# Altium PCB 06002480宁波2号线二期车载PIS系统_功率放大器音频板2 BHC-A-2030-05_PCB V1.0.PcbDoc (part 3 of 6)
Units mil, origin at the board's own origin, x right, y up, seen from the top; angles counter-clockwise.
Board outline 3385.83 x 3779.53 mil, 4 copper layers (Top Layer, GND, VDD, Bottom Layer); 210 components, 185 nets, 792 pads, 313 vias.
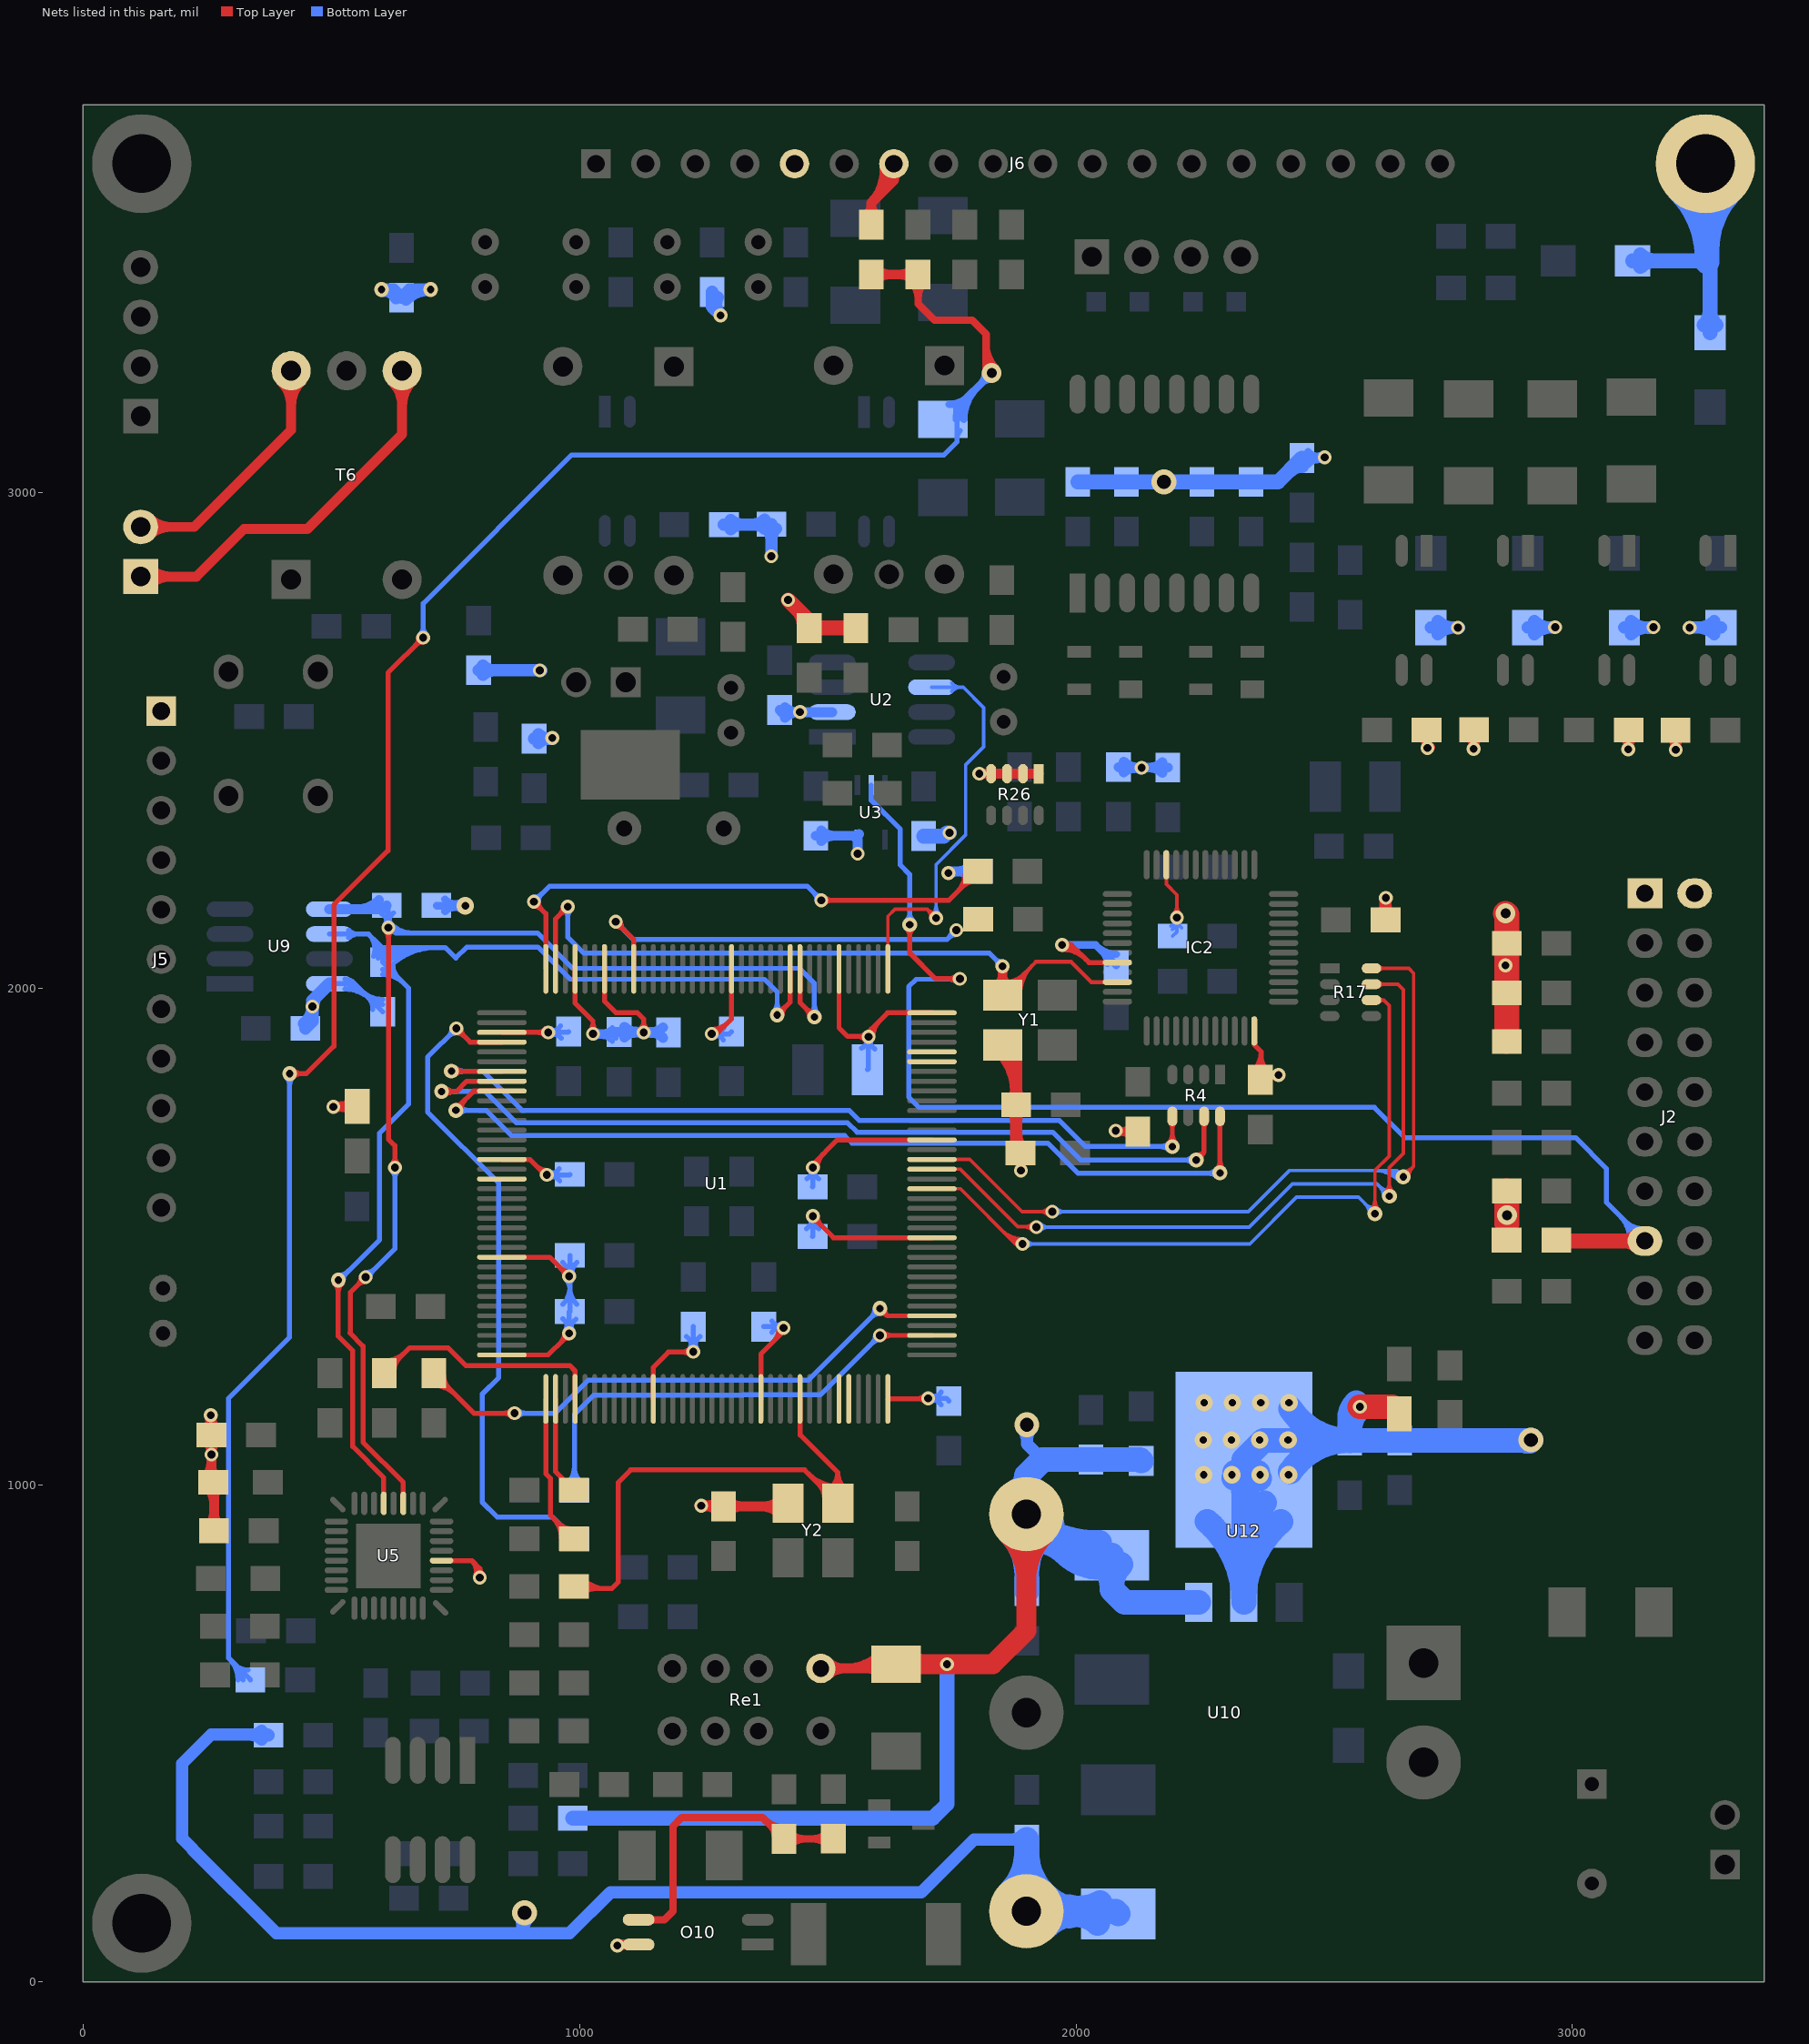
[diagram p5: the nets of this part, all layers, seen from the top]

## Via types
v1: diameter 28, hole 16, Top Layer to Bottom Layer, 240 vias
v2: diameter 30, hole 15, Top Layer to Bottom Layer, 25 vias
v3: diameter 35, hole 15, Top Layer to Bottom Layer, 16 vias
v4: diameter 30, hole 18, Top Layer to Bottom Layer, 10 vias
v5: diameter 40, hole 20, Top Layer to Bottom Layer, 9 vias
v6: diameter 50, hole 25, Top Layer to Bottom Layer, 7 vias
v7: diameter 50, hole 28, Top Layer to Bottom Layer, 5 vias
v8: diameter 36, hole 20, Top Layer to Bottom Layer, 1 vias

## Nets (pads, with @x,y where several pads share a name; then routed paths per layer and width w, separated by ;. In a path a pad name is that pad's centre, name@x,y a point inside that pad or via, vN(x,y) a via of type N, cw(c..) or ccw(c..) an arc to the next point about the centre after c; other vN are vias at no path point) (continued)
DC+3.3V: C7.1 C8.2 C9.1 C11.2 C20.2 C22.2 C24.2 C34.2 C38.1 C39.2 C40.2 C41.2 C42.2 C43.2 C44.2 C47.2 C48.2 C49.2 C50.2 C51.2 C52.2 C53.2 C69.2 C71.1 C74.1 C77.1 IC2.22 IC2.32 IC2.48 J2.1 J2.2 J5.1 L6.2 LED1.1 LED2.1 O10.4 R2.1 R7.2 R8.1 R10.1 R12.2 R13.1 R14.2 R15.2 R18.1 R21.2 R25.2 R26.1 R26.2 R26.3 R26.4 R32.1 R34.2 R36.2 R38.1 R43.2 R44.1 R45.1 R46.1 R47.1 R48.1 R55.1 R56.1 R60.1 R61.1 R62.1 R65.1 R66.1 U1.6 U1.17 U1.30 U1.33 U1.39 U1.52 U1.62 U1.72 U1.84 U1.95 U1.108 U1.121 U1.131 U1.144 U2.2 U3.5 U5.20 U9.8 U12.2 U12.4 Y1.4 Y2.4 | length 14843.3
  Top Layer w7: IC2.22@2181.78,2249.59 2181.78,2210.22 2203,2189 v1(2203,2143) v1@2203,2136 ; v1@2195.58,2150.42 ccw(c2177.65,2168.35) 2203,2168.35 ccw(c2228.35,2168.35) v1@2210.42,2150.42
  Top Layer w10: U5.20@721.94,848.26 722.2,848 783,848 ; v1@790.45,816.8 ccw(c761.34,826.34) 783,848 ; v1@793.6,821.2 ccw(c785.5,832) 799,832 ; 794.51,836.49 cw(c778.67,820.66) v1@799.95,813.69 ; v1(799,814) 799,832 ; v1@804.4,821.2 cw(c812.5,832) 799,832 ; U1.72@843.44,1262.44 936.44,1262.44 968,1294 ; U1.62@843.44,1459.29 939.71,1459.29 979,1420 v1(979,1421) ; U1.52@843.44,1656.14 899.86,1656.14 931,1625 v1(934,1625) ; U1.39@843.44,1912.05 936.05,1912.05 937,1913 v1(937,1912) ; 913.51,1642.49 ccw(c934,1662.97) v1@934,1634 ; 915.16,1912.05 cw(c915.16,1890.16) v1@930.64,1905.64 ; 915.39,1912.05 ccw(c915.39,1933.61) v1@930.64,1918.36 ; 920.76,1635.24 cw(c910.51,1625) v1@925,1625 ; 961.93,1437.07 ccw(c979,1454.14) v1@979,1430 ; 962.93,1288.93 ccw(c945.86,1306) v1@970,1306 ; 964.34,1434.66 cw(c950.69,1421) v1@970,1421 ; 965.34,1291.34 cw(c979,1277.69) v1@979,1297 ; v1@970.18,1304.22 cw(c962.36,1302.64) 968,1297 ; v1@970.38,1303.42 cw(c961.3,1300.7) 968,1294 ; v1@974.81,1298.03 ccw(c972.11,1292.89) 968,1297 ; v1@977.59,1297.11 ccw(c975.84,1286.16) 968,1294 ; v1(979,1306) 977,1306 968,1297 ; U1.33@991.08,2040 991.08,1970.92 1027,1935 v1(1027,1909) ; v1@1020.64,1915.36 ccw(c1005.27,1930.73) 1027,1930.73 ccw(c1048.73,1930.73) v1@1033.36,1915.36 ; U1.30@1050.13,2040 1050.13,1975 1073.13,1952 1116,1952 1129,1939 v1(1129,1912) ; v1@1122.64,1918.36 ccw(c1107.27,1933.73) 1129,1933.73 ccw(c1150.73,1933.73) v1@1135.36,1918.36 ; U1.84@1148.56,1173.86 1148.56,1237.56 1179,1268 1228,1268 v1(1229,1269) ; 1204.86,1268 ccw(c1204.86,1293.14) v1@1222.64,1275.36 ; 1209.69,1268 cw(c1209.69,1249.69) v1@1222.64,1262.64 ; v1@1266,1908 ccw(c1266,1929.73) 1281.36,1914.36 ; v1(1266,1909) 1266,1906 1267,1905 1272,1905 1306.04,1939.04 U1.17@1306.04,2040 ; v1@1266,1918 ccw(c1266,1963.87) 1298.44,1931.44 ; U1.95@1365.09,1173.86 1365.09,1264.09 1412,1311 1412,1316 v1(1411,1317) ; 1390.69,1289.69 ccw(c1363.37,1317) v1@1402,1317 ; v1@1470,1533 cw(c1470,1516.1) 1481.95,1528.05 ; v1(1470,1542) 1470,1540 1511.34,1498.66 U1.121@1709.58,1498.66 ; v1(1470,1640) 1470,1636 1471,1635 1471,1647.51 1519,1695.51 U1.131@1709.58,1695.51 ; v1@1479,1542 ccw(c1505.56,1542) 1486.78,1523.22 ; v1@1479,1640 cw(c1516.45,1640) 1489.97,1666.48 ; U1.6@1522.57,2040 1522.57,1921.43 1540,1904 1583,1904 1583,1914 1620.42,1951.42 U1.144@1709.58,1951.42 ; 1557.86,1904 cw(c1557.86,1878.86) v1@1575.64,1896.64 ; 1562.69,1904 ccw(c1562.69,1922.31) v1@1575.64,1909.36 ; v1@1581,1903 cw(c1602.73,1903) 1587.36,1918.36 ; v1@1591,1903 cw(c1636.87,1903) 1604.44,1935.44 ; U1.108@1621,1173.86 1702.86,1173.86 1703,1174 v1(1702,1175) ; 1677.52,1173.86 ccw(c1677.52,1199.49) v1@1695.64,1181.36 ; 1683.03,1173.86 cw(c1683.03,1156.03) v1@1695.64,1168.64 ; v1@1972,2079 cw(c1972,2011.4) 2019.8,2059.2 ; v1(1972,2088) 1991,2088 ; v1@1972,2089 cw(c1972,2045.54) 2002.73,2076.27 ; v1@1978.96,2082.3 cw(c1991,2072.45) 1991,2088 ; v1@1978.96,2093.7 ccw(c1991,2103.55) 1991,2088 ; v1(2080,1714) 2079,1714 v1@2080.68,1712.32 ; IC2.32@2083.36,2052.74 2026.26,2052.74 1991,2088 ; v1@2084.5,1706.21 cw(c2092.9,1691.66) 2097.25,1707.88 ; v1@2086.36,1707.64 cw(c2097.68,1696.32) 2097.68,1712.32 ; v1@2086.36,1720.36 ccw(c2105.77,1739.77) R8.1@2105.77,1712.32 ; v1@2086.99,1719.67 ccw(c2094.15,1725.48) 2096.54,1716.57 ccw(c2100.11,1703.23) v1@2087.93,1709.75 ; v1@2088.06,1718 ccw(c2107.6,1727.68) R8.1@2101.95,1706.62 ; R8.1@2109.23,1699.25 ccw(c2080.68,1674.6) v1@2080.68,1712.32 ; R8.1@2109.23,1725.39 cw(c2080.68,1750.05) v1@2080.68,1712.32 ; R8.1@2123,1736 2124.37,1734.63 R8.1@2124.37,1712.32 v1@2080.68,1712.32 ; C9.1@2357.12,1835.81 ccw(c2321.51,1873) 2373,1873 ; IC2.48@2358.95,1914.95 2358.95,1887.05 2373,1873 ; IC2.48@2359.85,1891.32 ccw(c2372.34,1891.32) 2363.51,1882.49 ; C9.1@2364.04,1828.58 ccw(c2343.93,1849.58) 2373,1849.58 ; 2373,1864.7 ccw(c2414.29,1864.7) C9.1@2385.09,1835.5 ; C9.1@2391.36,1816.36 C9.1@2370.95,1816.36 2373,1818.41 2373,1873 ; v1(2408,1826) v1@2413,1831 ; 783,848 799,832 ; 968,1294 968,1297
  Top Layer w15: v1(504,1762) 505,1763 LED1.1@552,1763 ; v1@507.25,1756.37 cw(c519.29,1735.52) 525.52,1758.78 ; v1@507.25,1767.63 ccw(c515.99,1782.76) 520.51,1765.88 ; v1@508.6,1757.4 cw(c522.11,1743.89) 522.11,1763 ; v1@509.63,1758.75 cw(c521.67,1751.8) 518.07,1765.23 ; LED1.1@539.63,1750.63 ccw(c509.75,1720.75) 509.75,1763 ccw(c509.75,1805.25) LED1.1@539.63,1775.37 ; C7.1@1877.83,1654.76 cw(c1863.72,1635) v1@1888,1635 ; C7.1@1888,1652.11 ccw(c1907.11,1652.11) v1@1893.6,1638.6 ; C7.1@1888,1669 v1@1888,1635 ; v1(1889,1634) v1@1888,1635 ; C7.1@1898.17,1654.76 ccw(c1912.28,1635) v1@1888,1635
  Top Layer w20: C77.1@246.39,1016.61 ccw(c217.5,1045.5) 258.36,1045.5 ; C69.2@247.75,1090.44 cw(c222.15,1064.83) 258.36,1064.83 cw(c294.57,1064.83) C69.2@268.97,1090.44 ; C69.2@247.75,1111.65 ccw(c222.15,1137.26) 258.36,1137.26 ccw(c294.57,1137.26) C69.2@268.97,1111.65 ; C77.1@251.39,995.39 cw(c221.74,965.74) 263.68,965.74 ; L6.2@253.07,918.98 ccw(c227.46,944.58) 263.68,944.58 ccw(c299.89,944.58) L6.2@274.28,918.98 ; v1@253.54,1139 cw(c238.42,1130.27) C69.2@255.28,1125.76 ; v1(257,1141) 258.36,1139.64 C69.2@258.36,1101.05 v1(258.36,1062) 258.36,1009.64 C77.1@262,1006 263.68,1004.32 L6.2@263.68,908.37 ; 258.36,1038.93 ccw(c289.93,1038.93) C77.1@267.61,1016.61 ; 263.68,973.83 cw(c294.17,973.83) C77.1@272.61,995.39 ; v1(1076,73) 1074,75 O10.4@1119,75 ; v1@1078.83,70.17 cw(c1090.49,58.51) O10.4@1090.49,75 ; v1(1245,959) 1241,959 1242.36,957.64 C34.2@1290.05,957.64 1413.64,957.64 Y2.4@1420,964 ; v1@1247,962.46 ccw(c1257.98,981.48) 1263.66,960.27 ; C34.2@1279.44,947.03 ccw(c1253.83,921.43) 1253.83,957.64 ccw(c1253.83,993.85) C34.2@1279.44,968.25 ; C34.2@1300.65,947.03 cw(c1326.26,921.43) 1326.26,957.64 cw(c1326.26,993.85) C34.2@1300.65,968.25 ; 1364.45,957.64 cw(c1364.45,900.58) Y2.4@1404.8,940.93 ; 1371.76,957.64 ccw(c1371.76,1004.37) Y2.4@1404.8,971.33 ; v1(1805,2433) R26.4@1829,2433 R26.3@1861,2433 R26.2@1893,2433 R26.1@1925,2433 ; R61.1@2697.33,2508.76 cw(c2685.47,2492) v1@2706,2492 ; R61.1@2706,2499.49 ccw(c2722.49,2499.49) v1@2710.83,2487.83 ; R61.1@2706,2521 v1@2706,2492 ; v1(2708,2485) 2712,2485 2713,2486 2712,2486 v1@2706,2492 ; R61.1@2714.67,2508.76 ccw(c2726.53,2492) v1@2706,2492 ; R55.1@2791.04,2510.65 cw(c2765.43,2485.05) 2801.65,2485.05 cw(c2837.86,2485.05) R55.1@2812.25,2510.65 ; v1(2801,2483) 2801.65,2483.65 R55.1@2801.65,2521.26 ; R62.1@3102.39,2510.39 cw(c3076.79,2484.79) 3113,2484.79 cw(c3149.21,2484.79) R62.1@3123.61,2510.39 ; v1(3112,2482) 3113,2483 R62.1@3113,2521 ; R56.1@3197.04,2509.65 cw(c3171.43,2484.05) 3207.65,2484.05 cw(c3243.86,2484.05) R56.1@3218.25,2509.65 ; R56.1@3207.65,2520.26 3207.65,2481.35 v1(3208,2481)
  Top Layer w25: Y1.4@1846.44,1873.57 cw(c1766.97,1794.09) 1879.36,1794.09 ; Y1.4@1852,1887 1879.36,1859.64 C8.2@1879.36,1766.05 1879.36,1677.64 C7.1@1888,1669 ; Y1.4@1864.12,1891.25 cw(c1827.32,1854.45) 1879.36,1854.45 ; C8.2@1870.52,1757.21 cw(c1849.18,1735.87) 1879.36,1735.87 cw(c1909.54,1735.87) C8.2@1888.2,1757.21 ; C8.2@1870.52,1774.89 ccw(c1849.18,1796.22) 1879.36,1796.22 ccw(c1909.54,1796.22) C8.2@1888.2,1774.89 ; 1879.36,1707.96 ccw(c1921.96,1707.96) C7.1@1891.84,1677.84 ; R21.2@2614.48,2147.47 ccw(c2593.15,2168.81) 2623.32,2168.81 ccw(c2653.5,2168.81) R21.2@2632.16,2147.47 ; R21.2@2623.32,2138.63 2623.32,2183.68 v1(2624,2183)
  Top Layer w30: v1(1420,2783) 1462.37,2740.63 R25.2@1462.37,2726.32 R7.2@1556.37,2726.32 ; 1438.72,2764.28 cw(c1405.76,2731.32) R25.2@1452.37,2731.32
  Top Layer w50: v1(2572,1158) 2637,1158 LED2.1@2651,1144 ; v5(2865,2152) 2867.68,2149.32 R12.2@2867.68,2091.37 R14.2@2867.68,1893.37 ; R15.2@2867.68,1592.37 2867.68,1526.68 2868,1527 v5(2868,1544)
  Bottom Layer w7: C20.2@2191.42,2125.93 ccw(c2184.63,2143) v1(2203,2143) ; C20.2@2194,2119.43 ccw(c2188.73,2132.68) v1@2203,2132.68 ; C20.2@2194.36,2105.95 2203,2114.59 v1(2203,2143) ; v1@2195.58,2135.58 cw(c2177.65,2117.65) 2203,2117.65 cw(c2228.35,2117.65) v1@2210.42,2135.58 ; C20.2@2212.75,2122.77 cw(c2228.85,2143) v1(2203,2143)
  Bottom Layer w10: U9.8@496,2010 546.95,2010 ; U9.8@527.5,1999.25 cw(c527.5,1926.33) R65.1@579.06,1977.89 ; U9.8@527.5,2009.25 cw(c527.5,1960.47) 561.99,1994.96 ; U9.8@527.5,2019.25 cw(c527.5,1994.61) 544.92,2012.04 ; U9.8@536.59,2004.28 cw(c546.95,1997.76) 546.95,2010 ; U9.8@536.59,2015.72 ccw(c546.95,2022.24) 546.95,2010 ; 560.95,1996 ccw(c603.63,2038.68) R65.1@603.63,1978.32 ; 573.02,1983.93 cw(c547.42,1958.32) R65.1@583.63,1958.32 ; 578.02,1978.93 ccw(c603.63,2004.54) R65.1@603.63,1968.32 ; R65.1@603.63,1953.32 546.95,2010 ; v1@939.61,1617.97 cw(c947.81,1607.69) 951.22,1620.39 cw(c954.62,1633.09) v1@942.38,1628.29 ; v1@940.15,1631.57 ccw(c947.04,1638.93) 949.65,1629.19 ccw(c952.26,1619.45) v1@942.61,1622.38 ; v1@940.36,1618.64 cw(c955.73,1603.27) 955.73,1625 cw(c955.73,1646.73) v1@940.36,1631.36 ; v1@942.55,1904.91 cw(c950.91,1894.22) 954.42,1907.33 cw(c957.94,1920.45) v1@945.35,1915.37 ; v1@943.36,1905.64 cw(c958.73,1890.27) 958.73,1912 cw(c958.73,1933.73) v1@943.36,1918.36 ; v1@943.46,1918.26 ccw(c949.58,1924.19) 951.79,1915.96 ccw(c953.99,1907.73) v1@945.73,1909.81 ; C39.2@959.24,1637.78 cw(c934,1656.3) v1(934,1625) ; C39.2@960.16,1612.95 ccw(c934,1590.57) v1(934,1625) ; C40.2@961.43,1924.91 cw(c937,1941.57) v1(937,1912) ; C40.2@963.02,1900.33 ccw(c937,1877.15) v1(937,1912) ; C48.2@966.22,1364.09 ccw(c932.08,1398.24) 980.36,1398.24 ccw(c1028.65,1398.24) C48.2@994.5,1364.09 ; C47.2@966.22,1448.81 cw(c932.08,1414.67) 980.36,1414.67 cw(c1028.65,1414.67) C47.2@994.5,1448.81 ; C48.2@966.45,1335.58 cw(c937.81,1305.98) v1(979,1306) ; v1@971.27,1310.61 ccw(c953.47,1321.21) 973.48,1326.57 ccw(c993.47,1331.93) v1@983.39,1313.86 ; v1@971.53,1426.02 ccw(c957.97,1435.12) 973.75,1439.35 ccw(c988.43,1443.28) v1@982.51,1429.29 ; v1@972.64,1312.36 ccw(c957.27,1327.73) 979,1327.73 ccw(c1000.73,1327.73) v1@985.36,1312.36 ; v1@972.64,1414.64 cw(c953.99,1395.99) 980.36,1395.99 ; v1@972.64,1427.36 ccw(c953.99,1446.01) C47.2@980.36,1446.01 ; v1@975.44,1314.27 ccw(c969.64,1327.75) 983.81,1323.95 ccw(c998.01,1320.15) v1@986.22,1311.37 ; v1@975.53,1429.3 ccw(c967.13,1449.39) C47.2@988.15,1443.75 ; C40.2@977.95,1913.64 976.31,1912 v1(937,1912) ; 980.36,1402.56 cw(c997.44,1402.56) v1@985.36,1414.64 ; C47.2@980.36,1439.44 ccw(c997.44,1439.44) v1@985.36,1427.36 ; C47.2@980.36,1462.95 C48.2@980.36,1349.95 979,1348.59 v1(979,1306) ; C39.2@980.36,1625.95 979.41,1625 v1(934,1625) ; 985.63,1434.34 ccw(c996.88,1431.32) v1@986.79,1425.5 ; C48.2@992.72,1334.23 ccw(c1014.94,1305.98) v1(979,1306) ; v1(1027,1909) 1063.31,1909 C42.2@1066.95,1912.64 ; v1@1028.38,1909 cw(c1028.38,1856.07) C42.2@1065.81,1893.5 ; v1@1031.5,1901.21 cw(c1042.97,1881.33) 1048.91,1903.5 ; v1@1031.5,1916.79 ccw(c1045.88,1941.7) 1053.32,1913.92 ; v1@1033.36,1902.64 cw(c1048.73,1887.27) 1048.73,1909 cw(c1048.73,1930.73) v1@1033.36,1915.36 ; v1@1034.79,1904.5 cw(c1047.52,1897.15) 1043.72,1911.35 ; v1@1034.79,1913.5 ccw(c1052.55,1923.75) 1047.25,1903.95 ; v1@1034.96,1909 ccw(c1034.96,1952.64) C42.2@1065.81,1921.78 ; 1052.52,1909 cw(c1052.52,1880.21) C42.2@1072.88,1900.57 ; C49.2@1215.53,1299.62 cw(c1187.47,1269) v1(1229,1269) ; v1@1221.24,1273.56 ccw(c1202.98,1284.29) 1223.44,1289.77 ccw(c1243.9,1295.25) v1@1233.44,1276.83 ; v1@1222.64,1275.36 ccw(c1207.27,1290.73) 1229,1290.73 ccw(c1250.73,1290.73) v1@1235.36,1275.36 ; v1@1224.58,1276.84 ccw(c1214.31,1295.09) 1234.54,1289.67 ccw(c1254.76,1284.25) v1@1236.74,1273.58 ; C49.2@1229.05,1319.36 1229,1319.31 v1(1229,1269) ; C49.2@1242.51,1299.57 ccw(c1270.34,1269) v1(1229,1269) ; v1@1272.3,1915.43 ccw(c1278.82,1922.07) 1281.23,1913.08 ccw(c1283.64,1904.09) v1@1274.67,1906.59 ; v1@1272.36,1902.64 cw(c1287.73,1887.27) 1287.73,1909 cw(c1287.73,1930.73) v1@1272.36,1915.36 ; v1@1272.5,1902.78 cw(c1278.53,1897) 1280.69,1905.06 cw(c1282.85,1913.13) v1@1274.74,1911.14 ; C43.2@1289.77,1896.89 ccw(c1266,1879.63) v1(1266,1909) ; C43.2@1290.12,1920.85 cw(c1266,1939.46) v1(1266,1909) ; C43.2@1305.95,1913.64 1301.31,1909 v1(1266,1909) ; C50.2@1371.05,1319.36 v1@1408.64,1319.36 ; C50.2@1383.57,1319.36 cw(c1383.57,1289.57) v1@1404.64,1310.64 ; C50.2@1387.63,1308.19 cw(c1408.64,1294.04) v1@1408.64,1319.36 ; C50.2@1387.63,1330.54 ccw(c1408.64,1344.69) v1@1408.64,1319.36 ; C50.2@1393.18,1323.5 cw(c1389.8,1310.88) v1@1402.35,1314.51 ; C50.2@1394.34,1323.19 ccw(c1398.49,1338.68) v1@1406.5,1324.79 ; C50.2@1394.97,1319.36 ccw(c1394.97,1333.03) v1@1404.64,1323.36 ; v1(1411,1317) v1@1408.64,1319.36 ; C52.2@1457.43,1517.01 ccw(c1438.87,1542) v1(1470,1542) ; C44.2@1458.1,1617.48 ccw(c1442.75,1640) v1(1470,1640) ; v1@1463.46,1535.82 cw(c1456.24,1529) 1465.83,1526.43 cw(c1475.42,1523.86) v1@1472.58,1533.38 ; v1@1463.64,1535.64 cw(c1448.27,1520.27) 1470,1520.27 cw(c1491.73,1520.27) v1@1476.36,1535.64 ; v1@1463.64,1633.64 cw(c1448.27,1618.27) 1470,1618.27 cw(c1491.73,1618.27) v1@1476.36,1633.64 ; v1@1466.97,1533.53 cw(c1462.95,1522.33) 1474.45,1525.4 cw(c1485.94,1528.48) v1@1476.86,1536.18 ; v1@1467.94,1631.24 cw(c1466.1,1623.39) 1473.89,1625.47 cw(c1481.68,1627.56) v1@1476.16,1633.44 ; C52.2@1469.36,1500.95 1470,1501.59 v1(1470,1542) ; C44.2@1469.36,1600.95 1470,1601.59 v1(1470,1640) ; C44.2@1481.47,1616.87 cw(c1499.05,1640) v1(1470,1640) ; C52.2@1482.08,1516.39 cw(c1503.19,1542) v1(1470,1542) ; C38.1@1568.06,1880.34 ccw(c1556.61,1903) v1(1582,1903) ; v1@1575.64,1896.64 cw(c1560.27,1881.27) 1582,1881.27 cw(c1603.73,1881.27) v1@1588.36,1896.64 ; v1@1579.82,1894.27 cw(c1577.76,1886.04) 1585.96,1888.23 cw(c1594.15,1890.43) v1@1588.26,1896.53 ; C38.1@1580,1837 1582,1839 v1(1582,1903) ; C38.1@1594.91,1878.59 cw(c1611.53,1903) v1(1582,1903) ; v1@1707.58,1182.06 ccw(c1715.86,1192.53) 1719.31,1179.64 ccw(c1722.77,1166.74) v1@1710.36,1171.68 ; v1@1707.79,1168.11 cw(c1715.57,1158.83) 1718.7,1170.53 cw(c1721.83,1182.22) v1@1710.46,1178.08 ; v1@1708.36,1168.64 cw(c1723.73,1153.27) 1723.73,1175 cw(c1723.73,1196.73) v1@1708.36,1181.36 ; C51.2@1728.24,1162.26 ccw(c1702,1141.6) v1(1702,1175) ; C51.2@1728.59,1187.45 cw(c1702,1209.63) v1(1702,1175) ; C51.2@1743.95,1169.64 1738.59,1175 v1(1702,1175)
  Bottom Layer w15: R66.1@711.68,2167.63 712.31,2167 v3(770,2167) ; R66.1@729.05,2155.26 cw(c757.4,2126.9) v3@757.4,2167 ; R66.1@729.05,2180 ccw(c760.45,2211.4) v3@760.45,2167 ; 742.38,2171.84 ccw(c749.5,2198.4) v3@764.53,2175.37 ; 742.81,2163.09 cw(c749.2,2139.25) v3@764,2159 ; 751.81,2169.31 cw(c747.74,2154.15) v3@761.34,2162 ; v3@762.93,2159.93 ccw(c745.86,2142.86) 745.86,2167 ccw(c745.86,2191.14) v3@762.93,2174.07 ; v1(1972,2088) 2039.59,2088 C11.2@2080.95,2046.64 ; v1@1976.6,2083.4 cw(c1987.69,2072.31) 1987.69,2088 cw(c1987.69,2103.69) v1@1976.6,2092.6 ; 2042.54,2085.05 ccw(c2080.95,2123.46) C11.2@2080.95,2069.14 ; 2054.61,2072.98 cw(c2033.28,2051.64) C11.2@2063.45,2051.64 ; R48.1@2454.95,3068.68 2499.68,3068.68 v1(2501,3070) ; R48.1@2467.33,3056.3 cw(c2497.2,3026.43) 2497.2,3068.68 cw(c2497.2,3110.92) R48.1@2467.33,3081.05 ; 2479.98,3073.29 ccw(c2486.04,3095.91) v1@2497.75,3075.63 ; 2482.11,3068.68 ccw(c2482.11,3088.89) v1@2496.4,3074.6 ; 2485.23,3065.47 ccw(c2480.91,3081.6) v1@2495.37,3073.25 ; 2486.61,3065.84 cw(c2490.41,3051.65) v1@2497.75,3064.37
  Bottom Layer w20: C42.2@1066.95,1912.64 C42.2@1079.95,1912.64 1156.95,1912.64 1156.31,1912 v1(1129,1912) ; C42.2@1090.56,1902.03 cw(c1116.17,1876.43) 1116.17,1912.64 cw(c1116.17,1948.85) C42.2@1090.56,1923.25 ; 1109.47,1910.84 cw(c1115.45,1888.53) v1@1127,1908.54 ; 1112.66,1913.58 ccw(c1117.55,1931.82) v1@1127,1915.46 ; v1@1140.33,1912.64 cw(c1140.33,1873.01) 1168.35,1901.03 ccw(c1141.87,1874.55) v1@1141.87,1912 ; 1143.61,1912 ccw(c1143.61,1946.98) 1168.35,1922.25 cw(c1145.15,1945.44) 1145.15,1912.64 ; 1146.96,1910.64 ccw(c1141.51,1890.33) 1131,1908.54 cw(c1141.89,1889.68) 1147.52,1910.71 ; C24.2@1403.05,2561.36 1407.41,2557 U2.2@1509,2557 ; C24.2@1413.65,2545.75 cw(c1440.8,2518.61) v1@1440.8,2557 ; C24.2@1413.65,2566.97 ccw(c1437.72,2591.03) v1@1437.72,2557 ; R43.2@1476,2308 1552,2308 U3.5@1560,2300 v1(1560,2272) ; R43.2@1486.61,2297.39 cw(c1512.21,2271.79) 1512.21,2308 cw(c1512.21,2344.21) R43.2@1486.61,2318.61 ; v1(1743,2233) 1746.37,2236.37 R18.1@1802.32,2236.37 ; v1@1745.83,2230.17 cw(c1760.79,2215.21) 1760.79,2236.37 ; R18.1@1786.72,2225.76 ccw(c1761.11,2200.16) 1761.11,2236.37 ccw(c1761.11,2272.58) R18.1@1786.72,2246.98 ; R36.2@2085.63,2446.32 2086.63,2445.32 R34.2@2184.63,2445.32 ; R36.2@2096.24,2435.72 cw(c2119.43,2412.52) v1@2119.43,2445.32 ; R36.2@2096.24,2456.93 ccw(c2124.26,2484.95) v1@2124.26,2445.32 ; 2113.43,2443.72 cw(c2119.08,2422.63) v1@2130,2441.54 ; R34.2@2174.02,2434.72 ccw(c2148.42,2409.11) 2148.42,2445.32 ccw(c2148.42,2481.54) R34.2@2174.02,2455.93 ; U3.5@1555.17,2308 ccw(c1555.17,2318.92) 1562.9,2311.2 cw(c1555.17,2318.92) U3.5@1555.17,2308
  Bottom Layer w25: C53.2@445.1,1930.02 ccw(c419.39,1964) v1(462,1964) ; C53.2@447.64,1920.05 462,1934.41 v1(462,1964) ; v1@463.5,1964 cw(c496.09,1964) 473.05,1987.05 ; U9.8@496,2010 462,1976 v1(462,1964) ; R38.1@796.63,2641.32 922.68,2641.32 923,2641 v1(920,2641) ; R38.1@805.47,2632.48 cw(c826.81,2611.15) 826.81,2641.32 cw(c826.81,2671.5) R38.1@805.47,2650.16 ; R60.1@908.37,2503.68 944.32,2503.68 945,2503 v1(945,2505) ; R60.1@917.21,2494.84 cw(c938.55,2473.5) 938.55,2503.68 cw(c938.55,2533.85) R60.1@917.21,2512.52 ; R32.1@1290.68,2934.63 1385.58,2934.63 R10.1@1386.32,2935.37 1386.32,2871.32 v1(1386,2871) ; R32.1@1304.52,2925.79 cw(c1325.85,2904.45) 1325.85,2934.63 cw(c1325.85,2964.81) R32.1@1304.52,2943.47 ; 1349.36,2934.63 ccw(c1349.36,2967.33) R10.1@1372.48,2944.21 ; 1352.93,2934.63 cw(c1352.93,2906.98) R10.1@1372.48,2926.53 ; R10.1@1377.48,2926.53 cw(c1356.15,2905.19) 1386.32,2905.19 cw(c1416.5,2905.19) R10.1@1395.16,2926.53
  Bottom Layer w30: C22.2@1693.05,2307.36 1733.36,2307.36 1740,2314 v1(1745,2314) ; R44.1@2003.37,3020.68 R45.1@2101.37,3020.68 v7(2177,3020.68) R46.1@2253.37,3020.68 R47.1@2352.37,3020.68 2406.95,3020.68 R48.1@2454.95,3068.68 ; 2429.35,3043.07 cw(c2454.95,3017.46) R48.1@2454.95,3053.68
  Bottom Layer w50: U12.4@2264.06,927.24 cw(c2120.86,764.01) U12.2@2338,764 ; U12.4@2318.01,1014.66 ccw(c2295.07,1050.95) U12.4@2338,1050.95 ; U12.4@2319.3,1026.3 cw(c2274.17,981.17) U12.4@2338,981.17 ; 2338,873.52 cw(c2458.51,873.52) U12.4@2379.58,964.58 ; U12.4@2338,959.44 cw(c2432.56,959.44) U12.4@2365.7,1026.3 ; U12.4@2369.8,1013.6 cw(c2375.84,1050.95) U12.4@2338,1050.95 ; U12.4@2412.33,926.8 ccw(c2553.43,764.01) U12.2@2338,764 ; U12.4@2431.67,1027.27 cw(c2550.99,945.99) C74.1@2550.99,1090.36 ; U12.4@2432.05,1153.71 ccw(c2550.99,1233.69) C74.1@2550.99,1090.36 ; C74.1@2551,1090 C74.1@2551,1090.36 ; C74.1@2551,1095 cw(c2624.49,1105.5) v1(2572,1158) 2551,1137 C74.1@2551,1090.36 ; v7(2916,1091) 2914,1089 2907,1089 2905.64,1090.36 C71.1@2652.05,1090.36 C74.1@2551,1090.36 ; U12.2@2338,764 U12.4@2338,1050.95 ; U12.4@2338,1050.95 U12.4@2338.45,1051.4 2377.41,1090.36 C74.1@2551,1090.36 ; 2551,1133.86 cw(c2596.14,1133.86) 2564.22,1165.78 ccw(c2596.14,1133.86) 2551,1133.86
  other v1: 2865,2047 2132,2445 1444,2557
  other v3: 2257,1021 2314,1021 2371,1021 2428,1021 2256,1091 2313,1091 2370,1091 2427,1091 2258,1166 2315,1166 2372,1166 2429,1166
DC+5V: C56.1 C58.2 C70.1 C72.1 D4.K R68.2 Re1.1 U10.5 U12.3 | length 4161.9
  Top Layer w20: Re1.1@1486,631 D4.K@1628.75,631 ; Re1.1@1499.81,617.19 cw(c1533.14,583.86) 1533.14,631 cw(c1533.14,678.14) Re1.1@1499.81,644.81 ; 1537.48,631 ccw(c1537.48,727.27) D4.K@1605.56,659.2 ; 1579.74,631 cw(c1579.74,594.49) D4.K@1605.56,620.31 ; 1585.77,631 ccw(c1585.77,678.99) D4.K@1619.7,645.06
  Top Layer w40: D4.K@1637.5,639.75 v1(1740,639.75) 1832.75,639.75 1900,707 U10.5@1900,942 ; D4.K@1662.38,627.38 cw(c1692.25,597.5) 1692.25,639.75 cw(c1692.25,682) D4.K@1662.38,652.13 ; U10.5@1861.11,903.11 cw(c1767.22,809.22) 1900,809.22 cw(c2032.78,809.22) U10.5@1938.89,903.11
  Bottom Layer w25: v7@1892.16,1113.16 cw(c1870.82,1091.82) 1901,1091.82 cw(c1931.18,1091.82) v7@1909.84,1113.16 ; v7(1901,1122) 1901,1083.28 1932.64,1051.64
  Bottom Layer w30: R68.2@986.32,329.37 1711.37,329.37 1740,358 v1(1740,639.75)
  Bottom Layer w50: U10.5@1864.64,906.64 cw(c1776.99,818.99) 1900.95,818.99 ; U10.5@1879.66,987.68 ccw(c1865.71,1019) 1900,1019 ; C58.2@1900.95,786.64 U10.5@1900.95,941.05 ; 1900.95,823.59 cw(c2018.41,823.59) U10.5@1935.36,906.64 ; U10.5@1901,892.01 cw(c1903.26,779.27) 1983,859 ; U10.5@1920.34,987.68 cw(c1934.29,1019) 1900,1019 ; U10.5@1949.99,941 ccw(c2062.73,938.74) 1983,859 ; 1980.18,861.82 ccw(c2044.73,926.37) C56.1@2049.67,835.22 ; C56.1@2029.87,840.49 ccw(c1985.17,795.79) 1985.17,859 ccw(c1985.17,922.21) C56.1@2029.87,877.51 ; C56.1@2046.96,885.14 cw(c2036.59,1076.67) U10.5@1900.96,941.04 ; C56.1@2053.49,840.49 cw(c2008.79,795.79) 2072,795.79 cw(c2135.21,795.79) C56.1@2090.51,840.49 ; C70.1@2131,1049 2128.36,1051.64 C72.1@2029.95,1051.64 1932.64,1051.64 1900,1019 ; U12.3@2247,764 2098,764 2072,790 C56.1@2072,859 1983,859 ; 1900,1019 U10.5@1900,942 U10.5@1900.95,941.05 ; U10.5@1900.95,941.05 1983,859
DC+24V: J6.5 R3.2 R19.2 R57.2 R58.2 R63.2 R64.2 | length 926
  Bottom Layer w25: v2@601.3,3405.52 cw(c607.11,3357.42) R19.2@641.37,3391.68 ; R19.2@630.43,3390.63 ccw(c601,3374.39) v2(601,3408) 625.05,3408 R19.2@641.37,3391.68 ; R19.2@650.21,3387.84 cw(c698.89,3339.16) v2@698.89,3408 ; v2(700,3408) 657.69,3408 R19.2@641.37,3391.68 ; R3.2@1266.97,3400.73 ccw(c1328.73,3400.73) v1@1285.06,3357.06 ; R3.2@1266.97,3403 1266.97,3373.03 v1(1284,3356) cw(c1306.24,3378.25) R3.2@1278.14,3392.38 ; R63.2@2715,2727.2 2770.8,2727.2 2771,2727 v1(2769,2727) ; R63.2@2728.43,2713.76 cw(c2760.86,2681.34) 2760.86,2727.2 cw(c2760.86,2773.06) R63.2@2728.43,2740.63 ; R57.2@2909.67,2727.2 2964.2,2727.2 v1(2965,2728) ; R57.2@2923.1,2713.76 cw(c2955.53,2681.34) 2955.53,2727.2 cw(c2955.53,2773.06) R57.2@2923.1,2740.63 ; R64.2@3104.33,2727.2 3162.2,2727.2 v1(3163,2728) ; R64.2@3117.77,2713.76 cw(c3150.19,2681.34) 3150.19,2727.2 cw(c3150.19,2773.06) R64.2@3117.77,2740.63 ; 3148.9,2727.54 ccw(c3153.46,2744.53) v1@3162.25,2729.3 ; v1(3236,2727) 3236.2,2727.2 R58.2@3299,2727.2 ; R58.2@3285.57,2713.76 ccw(c3253.14,2681.34) 3253.14,2727.2 ccw(c3253.14,2773.06) R58.2@3285.57,2740.63
DC-5V: C62.2 C63.1 R80.2 U10.3 | length 3318.7
  Bottom Layer w25: 334.84,498 cw(c334.84,463.14) R80.2@359.48,487.79 ; 341.45,498 ccw(c341.45,523.5) R80.2@359.48,505.47 ; R80.2@373.32,496.63 371.95,498 258,498 199.5,439.5 199.5,288.5 220,268 220,267 389,98 885,98 ; 885,99.17 cw(c928.83,99.17) v7@897.84,130.16 ; v7(889,139) 889,126 884,121 885,120 885,98 ; C63.1@1892.11,277.8 ccw(c1870.78,256.46) 1870.78,286.64 ccw(c1870.78,316.82) C63.1@1892.11,295.48 ; C63.1@1900.95,286.64 1794.64,286.64 1688,180 1062,180 980,98 885,98
  Bottom Layer w50: U10.3@1864.64,177.36 ccw(c1776.99,265.01) C63.1@1900.95,265.01 ; C63.1@1900.95,260.41 ccw(c2018.41,260.41) 1935.36,177.36 ccw(c2020.71,262.71) 2020.71,142 ccw(c2020.71,21.29) U10.3@1935.36,106.64 ; C63.1@1900.95,286.64 1900.95,142.95 U10.3@1900,142 2080,142 C62.2@2085,137 ; 1985.57,151.42 ccw(c2006.96,231.25) C62.2@2048.29,159.67 ; 1986.05,132.71 cw(c2001.65,74.49) C62.2@2043.29,118.07 ; 1986.1,142 cw(c1986.1,61.72) C62.2@2042.87,118.49 ; C62.2@2010.24,142 ccw(c2010.24,188.14) C62.2@2042.87,155.51
EARTH: C33.1 C35.1 pad.8@3267.72,3661.42 | length 905
  Bottom Layer w30: C33.1@3120.8,3466 3269,3466 3271,3464 3277,3458 C35.1@3277,3320.8 ; C33.1@3136.4,3454.34 cw(c3164.57,3426.18) 3164.57,3466 cw(c3164.57,3505.82) C33.1@3136.4,3477.66 ; C35.1@3265.34,3336.4 ccw(c3237.18,3364.57) 3277,3364.57 ccw(c3316.82,3364.57) C35.1@3288.66,3336.4 ; pad.8@3267.72,3661.42 pad.8@3271,3658.13
  Bottom Layer w50: pad.8@3214.68,3608.38 cw(c3078.72,3472.42) 3271,3472.42 ; 3271,3464 pad.8@3271,3658.13 ; 3271,3488.28 cw(c3440.86,3488.28) pad.8@3320.75,3608.38
EME_AUDIO_A: J1.1 T6.5 | length 979.4
  Top Layer w20: J1.1@116,2830 228.15,2830 324.07,2925.93 451.93,2925.93 642.62,3116.62 T6.5@642.62,3244.47 ; J1.1@133.68,2812.32 cw(c176.36,2769.64) 176.36,2830 cw(c176.36,2890.36) J1.1@133.68,2847.68 ; T6.5@621.85,3223.7 cw(c571.72,3173.57) 642.62,3173.57 cw(c713.53,3173.57) T6.5@663.39,3223.7
EME_AUDIO_B: J1.2 T6.3 | length 709.4
  Top Layer w20: J1.2@116,2930 224,2930 419,3125 T6.3@419,3244.47 ; J1.2@133.68,2912.32 cw(c176.36,2869.64) 176.36,2930 cw(c176.36,2990.36) J1.2@133.68,2947.68 ; T6.3@398.23,3223.7 cw(c348.09,3173.57) 419,3173.57 cw(c489.91,3173.57) T6.3@439.77,3223.7
EME_CLK_CPU: U1.104
EME_DATA_CPU: U1.103
EME_RE_CPU: U1.54
EME_RELAY: O10.3 R6.1 R97.2 | length 795.2
  Top Layer w15: O10.3@1119,125 1171,125 1188,142 1188,313 1206,331 1368.31,331 R97.2@1411.63,287.68 1510.72,287.68 R6.1@1511.37,288.32 ; 1373.22,326.09 ccw(c1411.63,364.5) R97.2@1411.63,310.18 ; 1385.29,314.02 cw(c1363.95,292.68) R97.2@1394.13,292.68 ; R97.2@1424,275.3 cw(c1453.88,245.43) 1453.88,287.68 cw(c1453.88,329.92) R97.2@1424,300.05 ; 1467.56,287.68 ccw(c1467.56,332.14) R6.1@1499,300.7 ; 1470.68,287.68 cw(c1470.68,247.64) R6.1@1499,275.95
ETHCLK: IC2.34 U1.35 Y1.3 | length 2005
  Top Layer w8: Y1.3@1834.6,2008.29 ccw(c1804.58,2045) v1(1852,2045) ; Y1.3@1839.66,2002.09 ccw(c1818.38,2028.12) 1852,2028.12 ccw(c1885.62,2028.12) Y1.3@1864.34,2002.09 ; v1@1843.34,2040 cw(c1822.43,2027.93) 1845.75,2021.68 cw(c1869.07,2015.43) v1@1857,2036.34 ; v1@1844.93,2037.93 cw(c1827.86,2020.86) 1852,2020.86 cw(c1876.14,2020.86) v1@1859.07,2037.93 ; v1@1847,2036.34 cw(c1834.93,2015.43) 1858.25,2021.68 cw(c1881.57,2027.93) v1@1860.66,2040 ; Y1.3@1859.87,2006.5 ccw(c1859.87,2034.55) Y1.3@1879.71,2014.71 ; Y1.3@1859.87,2014.5 ccw(c1859.87,2061.87) 1893.37,2028.37 ; Y1.3@1869.4,2008.29 cw(c1899.42,2045) v1(1852,2045) ; Y1.3@1871.37,1987 cw(c1918.13,1987) 1885.07,2020.07 ; Y1.3@1879.37,1987 cw(c1945.45,1987) 1898.72,2033.72 ; Y1.3@1887.37,1987 cw(c1972.76,1987) 1912.38,2047.38 ; IC2.34@2083.36,2013.37 2030.63,2013.37 1990,2054 1919,2054 Y1.3@1852,1987 v1(1852,2045)
  Top Layer w10: U1.35@951.71,2040 951.71,2140.71 v1(976,2165) ; v1@967,2165 cw(c945.27,2165) 960.64,2149.64 cw(c976,2134.27) v1@976,2156
  Bottom Layer w10: v1@969.64,2158.64 cw(c954.27,2143.27) 976,2143.27 cw(c997.73,2143.27) v1@982.36,2158.64 ; v1(976,2165) 976,2104 1008,2072 1825,2072 v1(1852,2045) ; v1@1843,2045 ccw(c1821.27,2045) 1836.64,2060.36 ccw(c1852,2075.73) v1@1852,2054
ETHCRS: R4.5 U1.43 | length 1848.3
  Top Layer w10: v2(742,1834) 742.69,1833.31 U1.43@843.44,1833.31 ; v2@749.07,1826.93 cw(c764.47,1811.53) 764.47,1833.31 ; v2@749.07,1841.07 ccw(c767.81,1859.81) 767.81,1833.31 ; v2@2186.93,1689.07 ccw(c2169.86,1706.14) 2194,1706.14 ccw(c2218.14,1706.14) v2@2201.07,1689.07 ; R4.5@2190.46,1729.78 cw(c2181.93,1721.24) 2194,1721.24 cw(c2206.07,1721.24) R4.5@2197.54,1729.78 ; v2(2194,1682) R4.5@2194,1743
  Bottom Layer w10: v2(742,1834) 805,1834 884,1755 1543,1755 1563,1735 1966,1735 2019,1682 v2(2194,1682) ; v2@749.07,1826.93 cw(c766.14,1809.86) 766.14,1834 cw(c766.14,1858.14) v2@749.07,1841.07 ; v2@2186.93,1674.93 ccw(c2169.86,1657.86) 2169.86,1682 ccw(c2169.86,1706.14) v2@2186.93,1689.07
ETHMDC: R20.2 U1.27 | length 921.2
  Top Layer w10: v1@1073,2126 cw(c1073,2104.27) 1088.36,2119.64 cw(c1103.73,2135) v1@1082,2135 ; v1(1073,2135) 1109.19,2098.81 U1.27@1109.19,2040
  Bottom Layer w10: v1@1073,2126 cw(c1073,2104.27) 1088.36,2119.64 cw(c1103.73,2135) v1@1082,2135 ; v1(1073,2135) 1109,2099 1740,2099 v1(1759,2118) ; v1@1750,2118 cw(c1728.27,2118) 1743.64,2102.64 cw(c1759,2087.27) v1@1759,2109
ETHMDIO: R22.2 U1.36 | length 1329.2
  Top Layer w10: v1@908,2166 cw(c908,2144.27) 923.36,2159.64 cw(c938.73,2175) v1@917,2175 ; v1(908,2175) 932.02,2150.98 U1.36@932.02,2040 ; v1(1487,2178) 1743.95,2178 R22.2@1802.32,2236.37 ; v1@1493.36,2171.64 cw(c1508.73,2156.27) 1508.73,2178 cw(c1508.73,2199.73) v1@1493.36,2184.36 ; 1759.65,2193.69 ccw(c1716.97,2236.37) R22.2@1777.32,2236.37 ; 1771.72,2205.76 cw(c1797.32,2180.16) R22.2@1797.32,2216.37 ; 1776.72,2210.76 ccw(c1751.11,2236.37) R22.2@1787.32,2236.37
  Bottom Layer w10: v1(908,2175) 939.63,2206.63 1458.37,2206.63 v1(1487,2178) ; v1@908,2184 ccw(c908,2205.73) 923.36,2190.36 ccw(c938.73,2175) v1@917,2175 ; v1@1478,2178 ccw(c1456.27,2178) 1471.64,2193.36 ccw(c1487,2208.73) v1@1487,2187
ETHRXD0: R4.7 U1.44 | length 1968.8
  Top Layer w10: v2(722,1793) 751.96,1793 772.58,1813.62 U1.44@843.44,1813.62 ; v2@729.07,1785.93 cw(c746.14,1768.86) 746.14,1793 cw(c746.14,1817.14) v2@729.07,1800.07 ; v2(2242,1655) 2258,1671 ; v2@2242.47,1664.99 ccw(c2243.43,1685.56) 2258,1671 ; v2@2251.99,1655.47 cw(c2272.56,1656.43) 2258,1671 ; R4.7@2254.46,1729.78 cw(c2245.93,1721.24) 2258,1721.24 cw(c2270.07,1721.24) R4.7@2261.54,1729.78 ; R4.7@2258,1743 2258,1671
  Bottom Layer w10: v2(722,1793) 810,1793 873,1730 1540,1730 1559,1711 1953,1711 2009,1655 v2(2242,1655) ; v2@729.07,1785.93 cw(c746.14,1768.86) 746.14,1793 cw(c746.14,1817.14) v2@729.07,1800.07 ; v2@2234.93,1647.93 ccw(c2217.86,1630.86) 2217.86,1655 ccw(c2217.86,1679.14) v2@2234.93,1662.07
ETHRXD1: R4.8 U1.45 | length 1975.5
  Top Layer w10: v2@751,1765 ccw(c751,1781.9) 762.95,1769.95 ; v2@757,1764 786.94,1793.94 U1.45@843.44,1793.94 ; v2@761,1755 cw(c792.38,1755) 770.19,1777.19 ; v2@2282.93,1636.07 ccw(c2265.86,1653.14) 2290,1653.14 ccw(c2314.14,1653.14) v2@2297.07,1636.07 ; R4.8@2286.46,1729.78 cw(c2277.93,1721.24) 2290,1721.24 cw(c2302.07,1721.24) R4.8@2293.54,1729.78 ; v2(2290,1629) R4.8@2290,1743
  Bottom Layer w10: v2(751,1755) 812,1755 863,1704 1534,1704 1549,1689 1943,1689 2004,1628 2289,1628 v2(2290,1629) ; v2@758.07,1747.93 cw(c775.14,1730.86) 775.14,1755 cw(c775.14,1779.14) v2@758.07,1762.07 ; 2263.44,1628 ccw(c2263.44,1655.56) v2@2282.93,1636.07 ; 2268.27,1628 cw(c2268.27,1607.27) v2@2282.93,1621.93
ETHTXD0: R17.7 U1.128 | length 1705.7
  Top Layer w7: U1.128@1709.58,1636.46 1767,1636.46 1882.46,1521 1921,1521 v1(1920,1520) ; 1892.24,1521 cw(c1892.24,1492.24) v1@1912.58,1512.58 ; 1897.07,1521 ccw(c1897.07,1542.94) v1@1912.58,1527.42 ; R17.7@2595,2009 2648,2009 2659,1998 2659,1668 2631,1640 v2(2631,1582) ; R17.7@2609.28,2004.4 cw(c2620.38,1993.31) 2620.38,2009 cw(c2620.38,2024.69) R17.7@2609.28,2013.6 ; v2@2622.87,1590.13 ccw(c2603.24,1609.76) 2631,1609.76 ccw(c2658.76,1609.76) v2@2639.13,1590.13
  Bottom Layer w7: v1(1920,1520) 2348.8,1520 2435.8,1607 2606,1607 v2(2631,1582) ; v1@1927.42,1512.58 cw(c1945.35,1494.65) 1945.35,1520 cw(c1945.35,1545.35) v1@1927.42,1527.42 ; v2@2619.5,1582 ccw(c2591.74,1582) 2611.37,1601.63 ccw(c2631,1621.26) v2@2631,1593.5
ETHTXD1: R17.8 U1.129 | length 1818.6
  Top Layer w7: U1.129@1709.58,1656.14 1786,1656.14 1891.14,1551 v1(1952,1551) ; v1@1944.58,1543.58 ccw(c1926.65,1525.65) 1926.65,1551 ccw(c1926.65,1576.35) v1@1944.58,1558.42 ; R17.8@2595,2041 2670,2041 2680,2031 2680,1642 v2(2659,1621) ; R17.8@2609.28,2036.4 cw(c2620.38,2025.31) 2620.38,2041 cw(c2620.38,2056.69) R17.8@2609.28,2045.6 ; v2@2659,1632.5 ccw(c2659,1660.26) 2678.63,1640.63 ccw(c2698.26,1621) v2@2670.5,1621
  Bottom Layer w7: v1(1952,1551) 2347,1551 2430,1634 2646,1634 v2(2659,1621) ; v1@1959.42,1543.58 cw(c1977.35,1525.65) 1977.35,1551 cw(c1977.35,1576.35) v1@1959.42,1558.42 ; 2599.85,1634 cw(c2599.85,1561.85) v2@2650.87,1612.87 ; 2616.75,1634 cw(c2616.75,1578.75) v2@2655.82,1617.82 ; 2633.65,1634 cw(c2633.65,1595.65) v2@2660.77,1622.77
ETHTXEN: R17.6 U1.126 | length 1712.9
  Top Layer w7: U1.126@1709.58,1597.09 1766.91,1597.09 1878,1486 v1(1892,1486) ; 1850.18,1513.82 ccw(c1892,1555.65) v1@1892,1496.5 ; 1862.13,1501.87 ccw(c1892,1531.75) v1@1892,1489.5 ; 1874.08,1489.92 ccw(c1892,1507.85) v1@1892,1482.5 ; v2@2593.87,1555.13 ccw(c2574.24,1574.76) 2602,1574.76 ccw(c2629.76,1574.76) v2@2610.13,1555.13 ; R17.6@2595,1977 2620,1977 ; v2(2602,1547) 2602,1634 2631,1663 2631,1966 2620,1977 ; R17.6@2609.36,1972.48 cw(c2620,1962.21) 2620,1977 ; R17.6@2609.36,1981.52 ccw(c2620,1991.79) 2620,1977
  Bottom Layer w7: v1(1892,1486) 2350,1486 2444,1580 2569,1580 v2(2602,1547) ; v1@1899.42,1478.58 cw(c1917.35,1460.65) 1917.35,1486 cw(c1917.35,1511.35) v1@1899.42,1493.42 ; v2@2590.5,1547 ccw(c2562.74,1547) 2582.37,1566.63 ccw(c2602,1586.26) v2@2602,1558.5
FEED_DOG: U1.1 U2.6 | length 928.1
  Top Layer w7: U1.1@1621,2040 1621,2146 1635,2160 1700,2160 v1(1718,2142) ; v1@1707.5,2142 ccw(c1682.15,2142) 1700.08,2159.92 ccw(c1718,2177.85) v1@1718,2152.5
  Bottom Layer w7: U2.6@1709,2607 1773,2607 1814,2566 1814,2487 1777.5,2450.5 1777.5,2309.5 1718,2250 v1(1718,2142) ; v1@1710.58,2149.42 ccw(c1692.65,2167.35) 1718,2167.35 ccw(c1743.35,2167.35) v1@1725.42,2149.42 ; U2.6@1749.16,2598.34 cw(c1770.07,2577.43) 1770.07,2607 cw(c1770.07,2636.57) U2.6@1749.16,2615.66
I2C1_SCL: U1.139
I2C1_SDA: U1.140
I2C2_SCL: R65.2 U1.11 U5.29 U9.6 | length 3097.4
  Top Layer w10: v2@506.93,1405.93 cw(c489.86,1388.86) 514,1388.86 cw(c538.14,1388.86) v2@521.07,1405.93 ; v2(514,1413) 514,1300 543,1271 543,1078 605.63,1015.37 U5.29@605.63,963.57 ; v2(1398,1947) 1424.15,1973.15 U1.11@1424.15,2040 ; v2@1398,1957 ccw(c1398,1981.14) 1415.07,1964.07 ccw(c1432.14,1947) v2@1408,1947
  Bottom Layer w10: U9.6@496,2110 575,2110 ; v2(514,1413) 515.77,1413 597,1494.23 597,1709 656,1768 656,2000.95 R65.2@603.63,2053.32 ; v2@514,1423 ccw(c514,1451.41) 534.09,1431.32 ; v2@524,1413 cw(c543.87,1413) 529.82,1427.05 ; U9.6@535.1,2102.4 cw(c553.44,2084.05) 553.44,2110 cw(c553.44,2135.95) U9.6@535.1,2117.6 ; R65.2@584.86,2065.22 ccw(c544.9,2079.9) 575,2110 ; 586.06,2098.94 cw(c561.08,2073.96) R65.2@594.24,2061.77 ; R65.2@587,2068 R65.2@602,2083 ; R65.2@589.49,2072.47 cw(c614.92,2047.03) R65.2@614.92,2083 ; R65.2@596.56,2065.39 cw(c639.06,2022.89) 639.06,2083 ; 597.13,2087.87 cw(c577.26,2068.01) 603.63,2058.32 cw(c663.2,1998.75) 663.2,2083 ; R65.2@603.63,2028.32 cw(c603.63,1967.97) 646.31,2010.65 ; R65.2@603.63,2038.32 cw(c603.63,2002.11) 629.24,2027.72 ; R65.2@610.7,2051.25 cw(c687.35,1974.61) 687.35,2083 ; R65.2@617.77,2044.18 cw(c711.49,1950.47) 711.49,2083 ; R65.2@623.63,2048.32 ccw(c659.84,2048.32) 634.24,2022.72 ; v2@1390.93,1954.07 ccw(c1373.86,1971.14) 1398,1971.14 ccw(c1422.14,1971.14) v2@1405.07,1954.07 ; v2(1398,1947) 1398,1993 1372,2019 981,2019 916,2084 773,2084 750.68,2061.68 729.35,2083 R65.2@602,2083 ; 575,2110 R65.2@602,2083
I2C2_SDA: R66.2 U1.10 U5.27 U9.5 | length 3022.2
  Top Layer w10: v1@560,1419 cw(c538.27,1419) 553.64,1403.64 cw(c569,1388.27) v1@569,1410 ; v1(569,1419) 538,1388 538,1308 537,1307 564,1280 564,1087 645,1006 U5.27@645,963.57 ; v1@608.64,2116.64 cw(c593.27,2101.27) 615,2101.27 cw(c636.73,2101.27) v1@621.36,2116.64 ; v1(615,2123) 615,1697 628,1684 v1(628,1640) ; v1@621.64,1646.36 ccw(c606.27,1661.73) 628,1661.73 ccw(c649.73,1661.73) v1@634.36,1646.36 ; U1.10@1443.83,2040 1443.83,1972.17 v2(1473,1943) ; v2@1463,1943 ccw(c1438.86,1943) 1455.93,1960.07 ccw(c1473,1977.14) v2@1473,1953
  Bottom Layer w10: v1(569,1419) 571,1421 573,1421 628,1476 v1(628,1640) ; v1@569,1428 ccw(c569,1454.56) 587.78,1435.78 ; v1@578,1419 cw(c594.9,1419) 582.95,1430.95 ; R66.2@601.29,2150.54 cw(c587.54,2127.93) 614,2127.93 cw(c647.41,2127.93) R66.2@625.06,2152.77 ; v1@608.03,2128.69 ccw(c597.65,2137.17) 610.6,2140.64 ccw(c624.47,2144.36) v1@618.65,2131.23 ; v1@608.64,2129.36 ccw(c595.69,2142.31) 614,2142.31 ; v1@610.5,2130.79 ccw(c603.47,2142.98) 617.06,2139.34 ; R66.2@611.68,2167.63 614,2165.31 614,2128 630,2112 ; R66.2@614,2147.14 ccw(c639.14,2147.14) 621.36,2129.36 ccw(c663.28,2171.28) 663.28,2112 ; v1@614.29,2122.29 ccw(c639.14,2147.14) 639.14,2112 ; 617.47,2140.89 ccw(c628,2138.07) v1@620.88,2129.81 ; v1@618.15,2114.57 cw(c622.08,2104.08) 630,2112 ; v1@621.64,1633.64 cw(c606.27,1618.27) 628,1618.27 cw(c649.73,1618.27) v1@634.36,1633.64 ; v1@624,2123 ccw(c636.07,2123) 627.54,2114.46 ; v2@1465.93,1950.07 ccw(c1448.86,1967.14) 1473,1967.14 ccw(c1497.14,1967.14) v2@1480.07,1950.07 ; v2(1473,1943) 1473,2011 1443,2041 986,2041 915,2112 630,2112
  Bottom Layer w20: U9.5@496,2160 604.05,2160 R66.2@611.68,2167.63 ; 552.04,2160 ccw(c552.04,2222.26) R66.2@596.07,2178.24
I2S2_CKIN: R96.1 U1.99 Y2.3 | length 1396.7
  Top Layer w10: R96.1@988.68,796.24 992.92,792 1065,792 1078,805 1078,1006 1103,1031 1453,1031 Y2.3@1520,964 1520,1026 ; R96.1@1000.75,803.31 ccw(c1028.06,830.62) 1028.06,792 ; R96.1@1007.82,782.1 cw(c1031.72,758.19) 1031.72,792 ; R96.1@1007.82,810.38 ccw(c1052.2,854.76) 1052.2,792 ; U1.99@1443.83,1173.86 1443.83,1101 1445,1101 1520,1026 ; 1461.33,1022.67 ccw(c1520,1081.35) Y2.3@1520,998.37 ; 1478.4,1005.6 ccw(c1520,1047.2) Y2.3@1520,988.37 ; 1480.34,1003.66 cw(c1448.55,971.87) Y2.3@1493.5,971.87 ; Y2.3@1503.75,992.8 ccw(c1477.97,1026) 1520,1026 ; Y2.3@1509.88,984.9 ccw(c1493.83,1005.57) 1520,1005.57 ccw(c1546.17,1005.57) Y2.3@1530.12,984.9 ; Y2.3@1536.25,992.8 cw(c1562.03,1026) 1520,1026
I2S2_SCK: R94.1 U1.74 | length 198.8
  Top Layer w10: U1.74@951.71,1173.86 951.71,1027.34 R94.1@988.68,990.37
I2S2_SD: R91.1 U1.76 | length 585.6
  Top Layer w10: R91.1@606.63,1225.64 657.99,1277 735,1277 771,1241 980,1241 991.08,1229.92 U1.76@991.08,1173.86 ; R91.1@606.63,1240.64 ccw(c606.63,1276.85) 632.24,1251.24 ; R91.1@606.63,1250.64 ccw(c606.63,1310.99) 649.31,1268.32 ; R91.1@626.63,1230.64 cw(c662.84,1230.64) 637.24,1256.24
I2S2_WS: R92.1 U1.73 | length 409.2
  Top Layer w10: U1.73@932.02,1173.86 932.02,1022.98 941,1014 941,940.05 R92.1@988.68,892.37 ; 946,935.05 cw(c903.32,892.37) R92.1@963.68,892.37 ; 958.07,922.98 ccw(c983.68,948.58) R92.1@983.68,912.37 ; 963.07,917.98 cw(c937.46,892.37) R92.1@973.68,892.37
I2S3_SCK: R95.1 U1.111 | length 1085.1
  Top Layer w10: v1(1605,1302) 1604,1302 1604.19,1301.81 U1.111@1709.58,1301.81 ; v1@1611.36,1295.64 cw(c1626.27,1280.73) 1626.27,1301.81 ; v1@1611.36,1308.36 ccw(c1627.18,1324.18) 1627.18,1301.81
  Bottom Layer w10: R95.1@975.53,1003.77 ccw(c941.39,1037.91) 989.68,1037.91 ccw(c1037.96,1037.91) R95.1@1003.82,1003.77 ; R95.1@989.68,989.63 989.68,1142.68 1028,1181 1329,1181 1330,1182 1485,1182 v1(1605,1302) ; v1@1596,1302 cw(c1574.27,1302) 1589.64,1286.64 cw(c1605,1271.27) v1@1605,1293
I2S3_SD: R90.1 U1.113 | length 1370.6
  Top Layer w10: R90.1@706.63,1200.64 cw(c706.63,1140.28) 749.31,1182.96 ; R90.1@706.63,1210.64 cw(c706.63,1174.42) 732.24,1200.03 ; R90.1@706.63,1225.64 787.27,1145 v1(869,1145) ; R90.1@726.63,1220.64 ccw(c762.84,1220.64) 737.24,1195.03 ; v1@862.64,1138.64 ccw(c847.27,1123.27) 847.27,1145 ccw(c847.27,1166.73) v1@862.64,1151.36 ; v2(1605,1356) 1619.82,1341.18 ; v2@1606.05,1346.06 cw(c1607.83,1329.19) 1619.82,1341.18 ; v2@1614.94,1354.95 ccw(c1631.81,1353.17) 1619.82,1341.18 ; U1.113@1709.58,1341.18 1619.82,1341.18
  Bottom Layer w10: v1(869,1145) 951,1145 1018,1212 1461,1212 v2(1605,1356) ; v1@875.36,1138.64 cw(c890.73,1123.27) 890.73,1145 cw(c890.73,1166.73) v1@875.36,1151.36 ; v2@1595,1356 cw(c1570.86,1356) 1587.93,1338.93 cw(c1605,1321.86) v2@1605,1346
I2S3_WS: R93.1 U1.40 | length 1542.8
  Top Layer w10: v1@752,1911 cw(c752,1889.27) 767.36,1904.64 cw(c782.73,1920) v1@761,1920 ; v1(752,1920) 779.64,1892.36 U1.40@843.44,1892.36
  Bottom Layer w10: v1@743,1920 cw(c721.27,1920) 736.64,1904.64 cw(c752,1889.27) v1@752,1911 ; v1(752,1920) 694,1862 694,1752 837,1609 837,1217 804,1184 804,966 834,936 945.31,936 R93.1@989.68,891.63 ; 947,934.31 cw(c904.32,891.63) R93.1@964.68,891.63 ; 959.07,922.24 ccw(c984.68,947.84) R93.1@984.68,911.63 ; 964.07,917.24 cw(c938.46,891.63) R93.1@974.68,891.63
I_SAMPLING: J6.7 R49.1 | length 376.6
  Top Layer w20: R49.1@1577.02,3553.97 ccw(c1551.42,3579.57) 1587.63,3579.57 ccw(c1623.84,3579.57) R49.1@1598.24,3553.97 ; R49.1@1587.63,3538.36 1587.63,3582.63 ; J6.7@1613.7,3658.94 cw(c1522.92,3647.35) 1587.63,3582.63 ; 1616.45,3611.45 ccw(c1574.03,3653.87) J6.7@1633.54,3661.47 ; J6.7@1623.52,3644.38 cw(c1614.37,3628.07) 1633.07,3628.07 ; J6.7@1633.07,3661.41 1633.07,3628.07 ; J6.7@1642.62,3644.38 ccw(c1651.77,3628.07) 1633.07,3628.07 ; 1587.63,3582.63 1633.07,3628.07
I_SAMPLING_U: C26.2 C75.2 D10.K R49.2 | length 4873.1
  Top Layer w10: v2(416,1829) 450,1829 505,1884 505,2169 614,2278 614,2636 v1(685,2707) ; v2@423.07,1821.93 cw(c440.14,1804.86) 440.14,1829 cw(c440.14,1853.14) v2@423.07,1836.07 ; v1@676,2707 cw(c654.27,2707) 669.64,2691.64 cw(c685,2676.27) v1@685,2698
  Top Layer w15: C26.2@1669.36,3420.99 cw(c1639.49,3391.11) 1681.74,3391.11 cw(c1723.99,3391.11) C26.2@1694.11,3420.99 ; C26.2@1681.74,3438.36 1681.74,3379.26 1715,3346 1791,3346 1819,3318 1819,3251 v5(1830,3240) ; 1819,3260.52 ccw(c1850.52,3260.52) v5@1828.23,3238.23 ; 1819,3296.73 ccw(c1886.73,3296.73) v5@1838.84,3248.84
  Top Layer w20: R49.2@1587.63,3438.36 C26.2@1681.74,3438.36 ; R49.2@1598.24,3427.75 cw(c1623.84,3402.15) 1623.84,3438.36 cw(c1623.84,3474.57) R49.2@1598.24,3448.97 ; C26.2@1671.13,3427.75 ccw(c1645.52,3402.15) 1645.52,3438.36 ccw(c1645.52,3474.57) C26.2@1671.13,3448.97
  Bottom Layer w10: 294.32,650.68 cw(c251.64,608) C75.2@312,608 ; 306.39,638.61 ccw(c332,664.21) C75.2@332,628 ; 311.39,633.61 cw(c285.79,608) C75.2@322,608 ; C75.2@337,608 293,652 293,1175 416,1298 v2(416,1829) ; v2@408.93,1821.93 cw(c391.86,1804.86) 416,1804.86 cw(c440.14,1804.86) v2@423.07,1821.93 ; v1@678.64,2713.36 ccw(c663.27,2728.73) 685,2728.73 ccw(c706.73,2728.73) v1@691.36,2713.36 ; v1(685,2707) 685,2776 984,3075 1734,3075 1760,3101 D10.K@1760,3146 ; 1760,3106.92 cw(c1783.82,3106.92) D10.K@1766.98,3123.76
  Bottom Layer w15: D10.K@1744,3176.74 ccw(c1744,3231.65) 1782.82,3192.82 ; D10.K@1759,3146.74 cw(c1812.73,3146.74) 1774.73,3184.73 ; D10.K@1760,3146 1760,3170 v5(1830,3240) ; D10.K@1774,3146.74 cw(c1863.94,3146.74) 1800.34,3210.34 ; v5@1817.5,3240 cw(c1787.32,3240) 1808.66,3218.66 cw(c1830,3197.32) v5@1830,3227.5
J_RST: J2.15 R2.2 U3.2 | length 3003.2
  Top Layer w10: v2@1657.93,2121.93 cw(c1640.86,2104.86) 1665,2104.86 cw(c1689.14,2104.86) v2@1672.07,2121.93 ; v2@1665,2134 1665,2072 1717,2020 v1(1766,2020) ; v1@1759.64,2013.64 ccw(c1744.27,1998.27) 1744.27,2020 ccw(c1744.27,2041.73) v1@1759.64,2026.36
  Top Layer w30: R2.2@2967.32,1493.63 2968.95,1492 J2.15@3146,1492 ; R2.2@2979.39,1500.7 ccw(c3000.4,1521.71) 3000.4,1492 ; J2.15@3130.39,1481.39 ccw(c3104.79,1455.79) 3104.79,1492 ccw(c3104.79,1528.21) J2.15@3130.39,1502.61
  Bottom Layer w10: U3.2@1587.56,2410 1587.56,2379.44 1646,2321 1646,2249 1665,2230 v2@1665,2134 ; v2@1657.93,2136.07 ccw(c1640.86,2153.14) 1665,2153.14 ccw(c1689.14,2153.14) v2@1672.07,2136.07 ; 1741.86,2019 ccw(c1741.86,2044.14) v1@1759.64,2026.36 ; 1746.69,2019 cw(c1746.69,2000.69) v1@1759.64,2013.64 ; v1@1766,2019 1678,2019 1663,2004 1663,1782 1684,1761 2601,1761 2662,1700 2938,1700 3006,1700 3068.5,1637.5 3068.5,1569.5 J2.15@3146,1492 ; 3094.79,1543.21 cw(c3043.57,1492) J2.15@3116,1492 ; 3106.86,1531.14 ccw(c3141,1565.28) J2.15@3141,1517 ; 3111.86,1526.14 cw(c3077.72,1492) J2.15@3126,1492
  other v2: 1665,2129